# Altium PCB INC-HBAUDIT98.PcbDoc
Units mil, origin at the board's own origin, x right, y up, seen from the top; angles counter-clockwise.
Board outline 10944.88 x 9807.09 mil, 2 copper layers (Top Layer, Bottom Layer); 48 components, 0 nets, 99 pads, 52 vias.
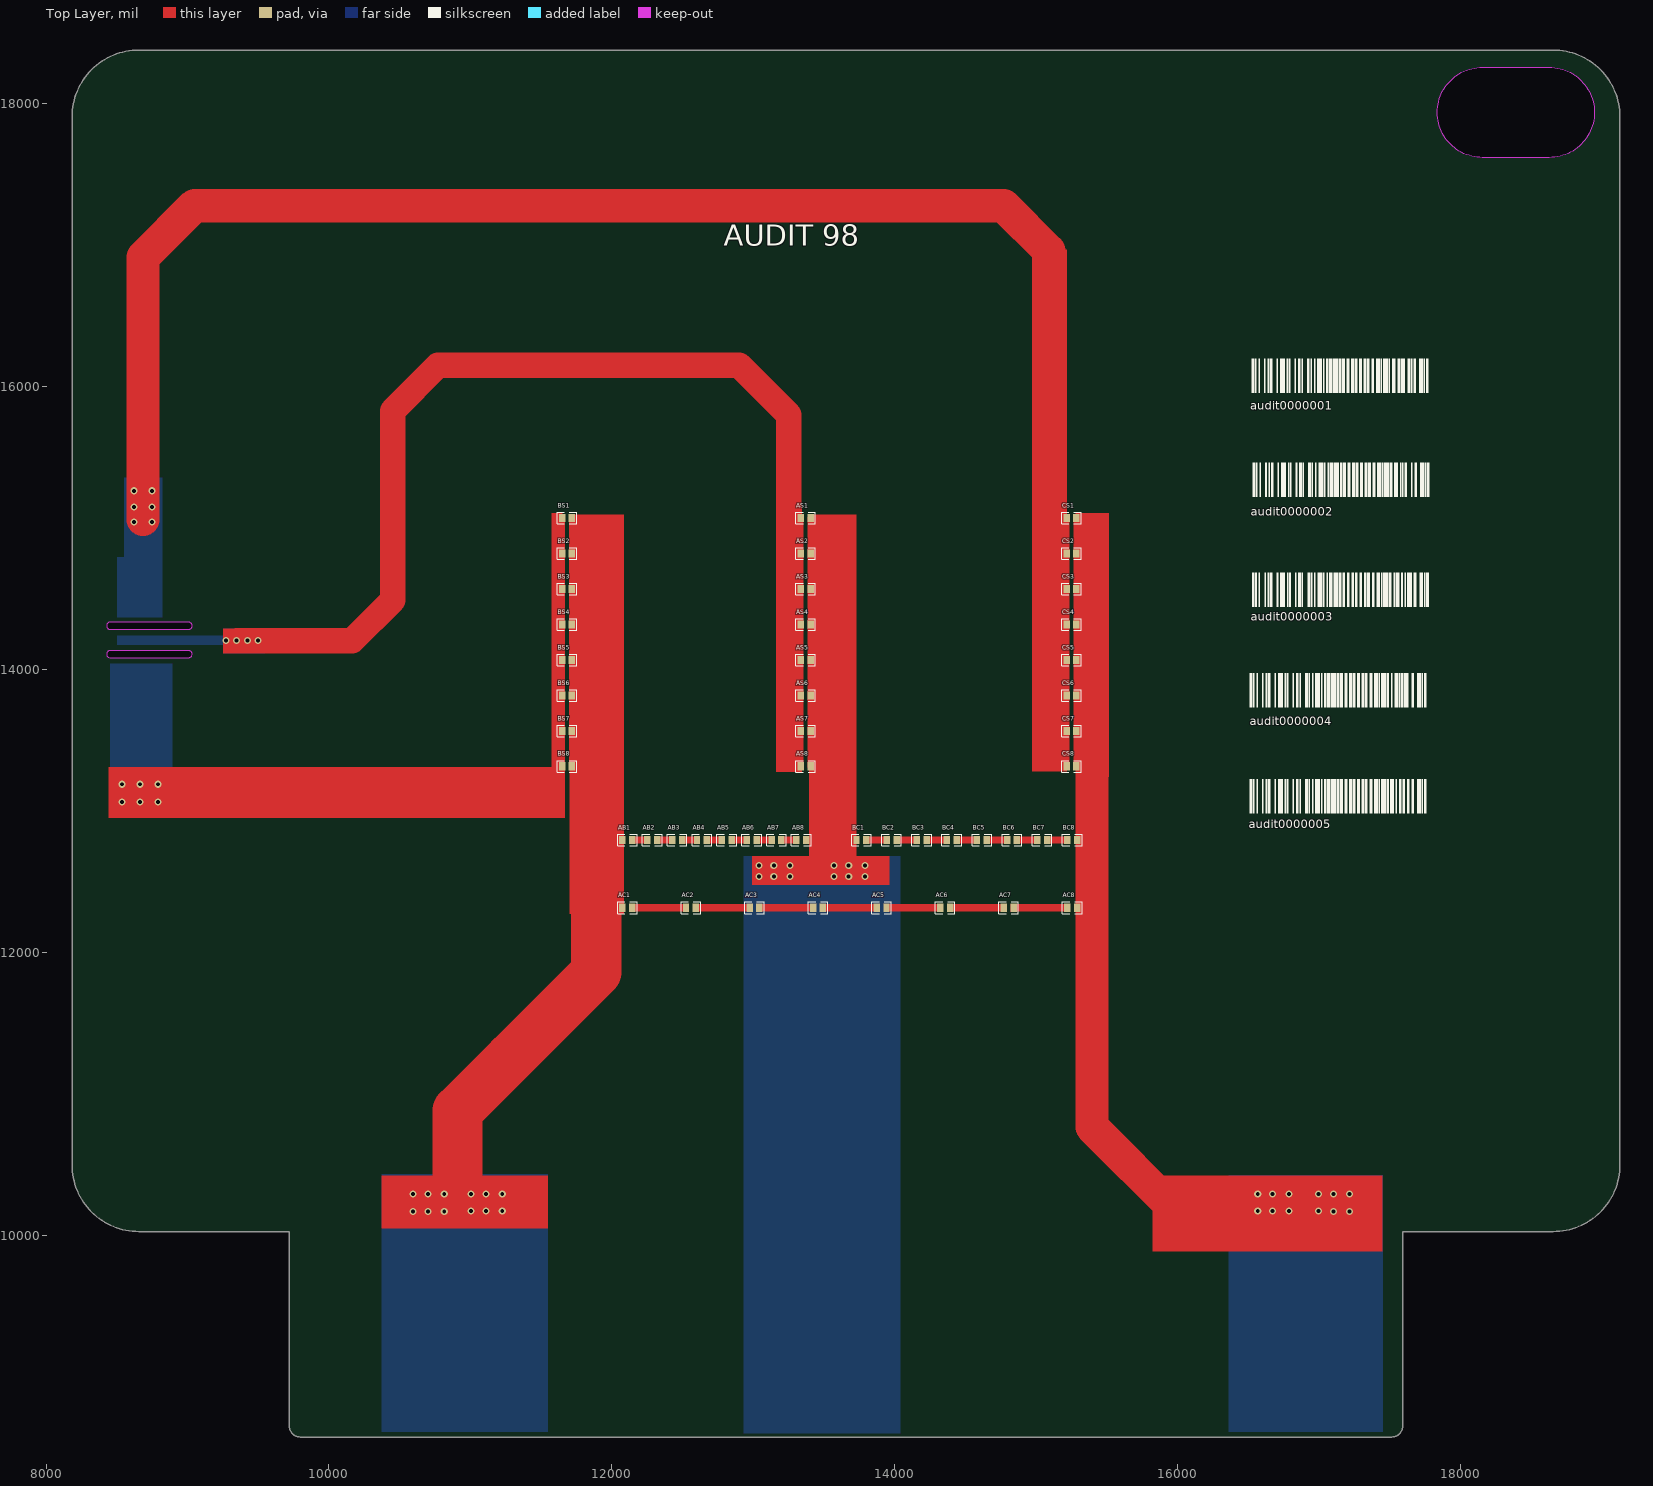
[diagram p0: Top Layer view]
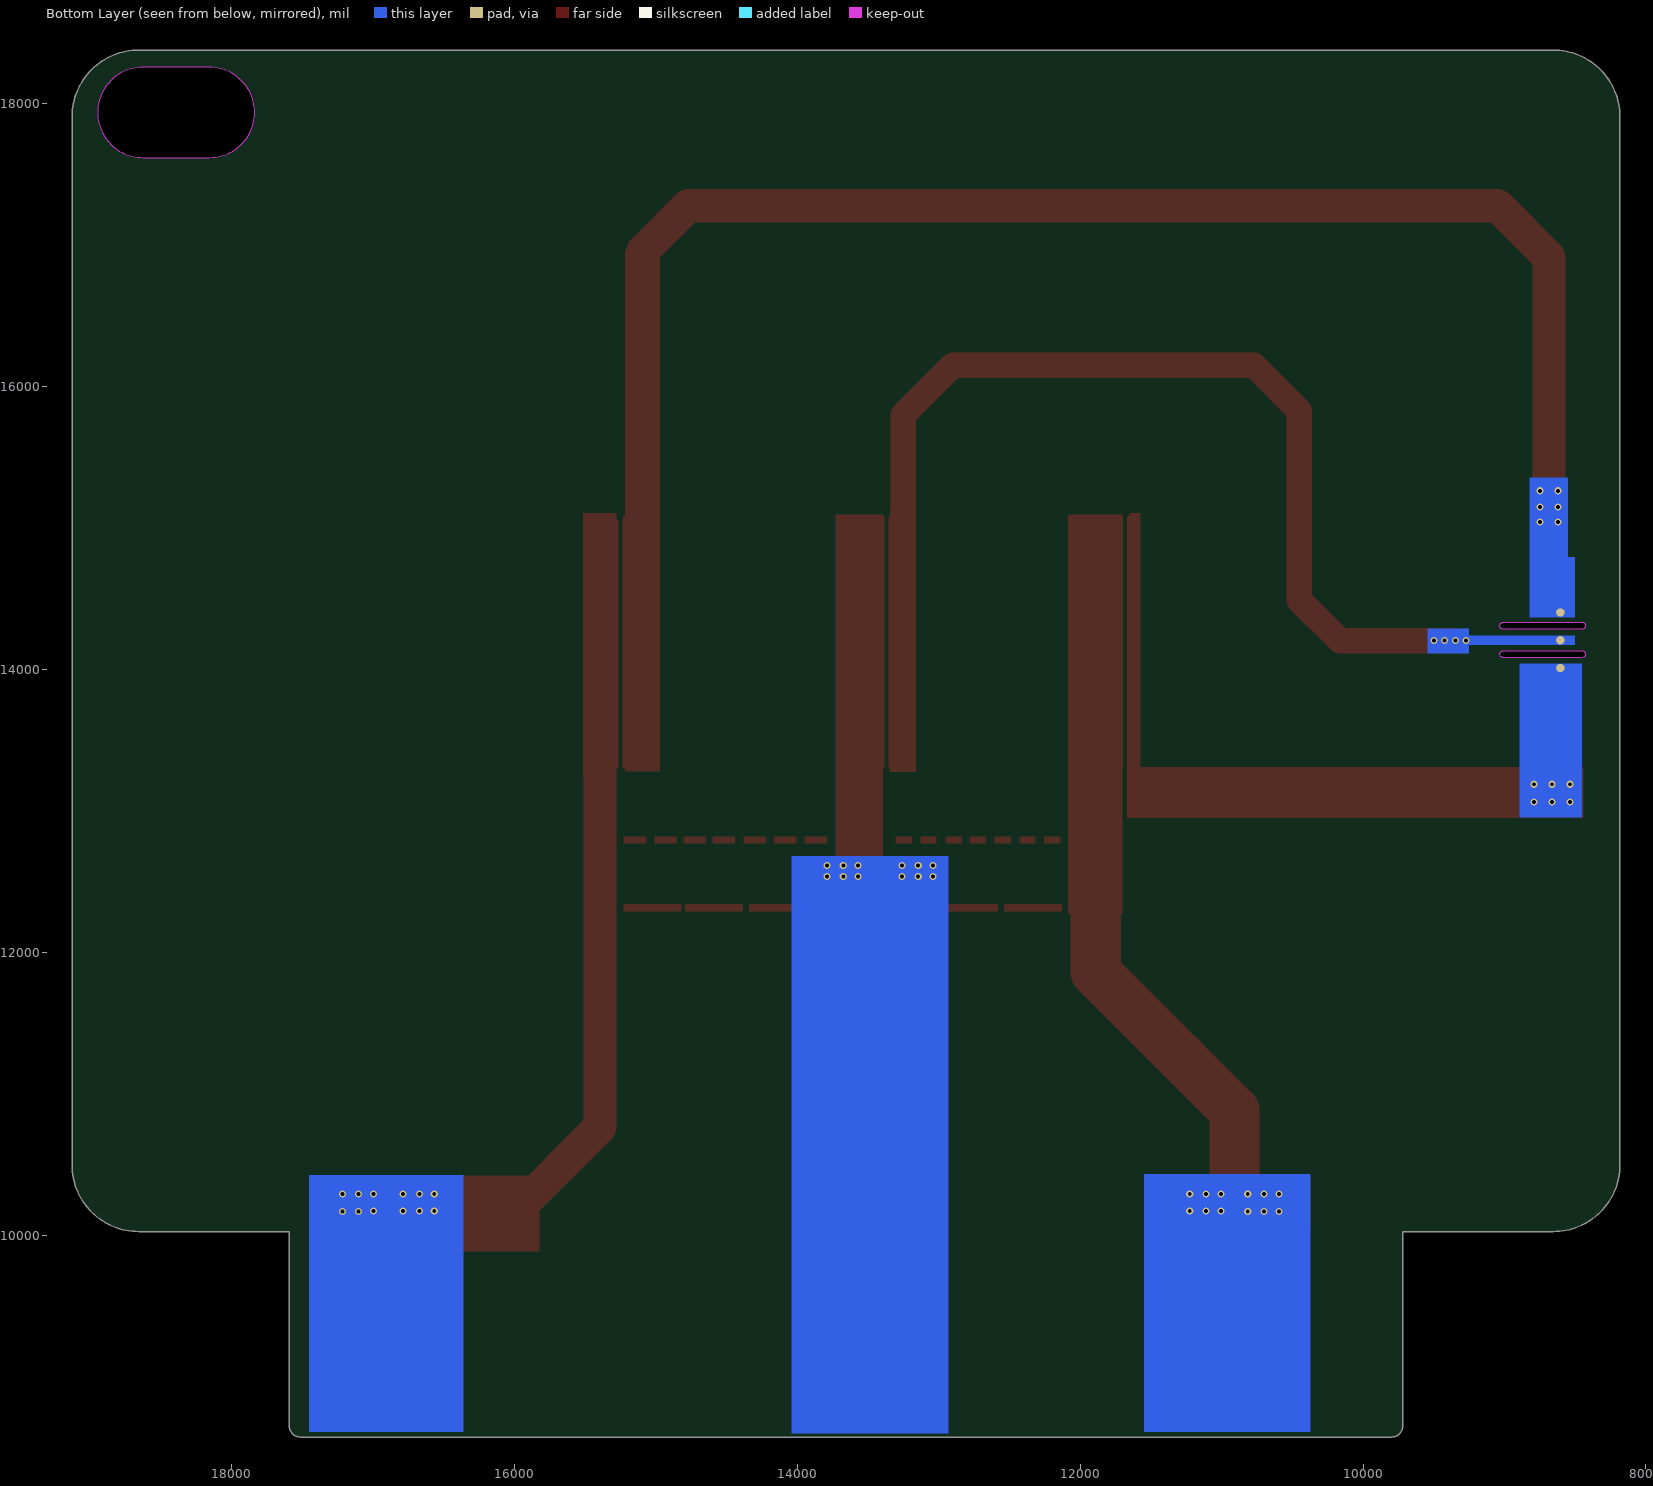
[diagram p1: Bottom Layer view, seen from below]

## Layer stack, top to bottom
Top Solder: solder mask 0.4, Solder Resist, Dk 3.5
Top Layer: signal copper 1.4
Dielectric 1: dielectric 12.6, FR-4, Dk 4.8
Bottom Layer: signal copper 1.4
Bottom Solder: solder mask 0.4, Solder Resist, Dk 3.5

## Board outline
8655.7,10025.29 9718.7,10025.29 9718.7,8651.28 ccw(c9797.44,8651.28) 9797.44,8572.54 17513.97,8572.54 ccw(c17513.97,8651.28) 17592.71,8651.28 17592.71,10025.29 18655.7,10025.29 ccw(c18655.7,10497.73) 19128.14,10497.73 19128.14,17907.18 ccw(c18655.7,17907.18) 18655.7,18379.62 8655.7,18379.62 ccw(c8655.7,17907.18) 8183.26,17907.18 8183.26,10497.73 ccw(c8655.7,10497.73)
cut-out: 8452.36,14283.35 9007.36,14283.35 ccw(c9007.36,14308.35) 9007.36,14333.35 8452.36,14333.35 ccw(c8452.36,14308.35)
cut-out: 8452.36,14083.35 9007.36,14083.35 ccw(c9007.36,14108.35) 9007.36,14133.35 8452.36,14133.35 ccw(c8452.36,14108.35)
cut-out: 18155.7,17619.78 cw(c18155.7,17938.68) 18155.7,18257.58 18628.14,18257.58 cw(c18628.14,17938.68) 18628.14,17619.78

## Design rules (kind name [scope] priority, off if disabled: settings)
Clearance [All] p1 off: gap=10 ignorepadtopadclearanceinfootprint=FALSE except(0: Arc-Hole Track-Hole SMDPad-Hole THPad-Hole Via-Hole Fill-Hole Poly-Hole Region-Hole Text-Hole)
PolygonConnect [All] p1: connectstyle=Relief reliefconductorwidth=10 reliefentries=4 polygonreliefangle="90 Angle" airgapwidth=10
RoutingVias [All] p1: holewidth=28 width=50 viastyle="Through Hole" minholewidth=28 minwidth=50 maxholewidth=28 maxwidth=50
ShortCircuit [All] p1 off: allowed=TRUE
SolderMaskExpansion [All] p1: expansion=4
Width [All] p1: maxlimit=1000 minlimit=10 preferedwidth=10
29 further rules are at their usual default settings.

## Components (designator, comment, footprint, x,y, rotation, side; value= is the part's Value field where it differs from the comment)
AB1 "Comment" 0805_R 12110,12795 r0 top
AB2 "Comment" 0805_R 12285.71,12795 r0 top
AB3 "Comment" 0805_R 12461.42,12795 r0 top
AB4 "Comment" 0805_R 12637.13,12795 r0 top
AB5 "Comment" 0805_R 12812.83,12795 r0 top
AB6 "Comment" 0805_R 12988.54,12795 r0 top
AB7 "Comment" 0805_R 13164.25,12795 r0 top
AB8 "Comment" 0805_R 13339.96,12795 r0 top
AC1 "Comment" 0805_R 12110,12315 r0 top
AC2 "Comment" 0805_R 12559.29,12315 r0 top
AC3 "Comment" 0805_R 13008.57,12315 r0 top
AC4 "Comment" 0805_R 13457.86,12315 r0 top
AC5 "Comment" 0805_R 13907.14,12315 r0 top
AC6 "Comment" 0805_R 14356.43,12315 r0 top
AC7 "Comment" 0805_R 14805.71,12315 r0 top
AC8 "Comment" 0805_R 15255,12315 r0 top
AS1 "Comment" 0805_R 13369.96,15070 r0 top
AS2 "Comment" 0805_R 13369.96,14819.29 r0 top
AS3 "Comment" 0805_R 13369.96,14568.57 r0 top
AS4 "Comment" 0805_R 13369.96,14317.86 r0 top
AS5 "Comment" 0805_R 13369.96,14067.14 r0 top
AS6 "Comment" 0805_R 13369.96,13816.43 r0 top
AS7 "Comment" 0805_R 13369.96,13565.71 r0 top
AS8 "Comment" 0805_R 13369.96,13315 r0 top
BC1 "Comment" 0805_R 13765.04,12795 r0 top
BC2 "Comment" 0805_R 13977.89,12795 r0 top
BC3 "Comment" 0805_R 14190.74,12795 r0 top
BC4 "Comment" 0805_R 14403.59,12795 r0 top
BC5 "Comment" 0805_R 14616.45,12795 r0 top
BC6 "Comment" 0805_R 14829.3,12795 r0 top
BC7 "Comment" 0805_R 15042.15,12795 r0 top
BC8 "Comment" 0805_R 15255,12795 r0 top
BS1 "Comment" 0805_R 11682.86,15070 r0 top
BS2 "Comment" 0805_R 11682.86,14819.29 r0 top
BS3 "Comment" 0805_R 11682.86,14568.57 r0 top
BS4 "Comment" 0805_R 11682.86,14317.86 r0 top
BS5 "Comment" 0805_R 11682.86,14067.14 r0 top
BS6 "Comment" 0805_R 11682.86,13816.43 r0 top
BS7 "Comment" 0805_R 11682.86,13565.71 r0 top
BS8 "Comment" 0805_R 11682.86,13315 r0 top
CS1 "Comment" 0805_R 15250.04,15070 r0 top
CS2 "Comment" 0805_R 15250.04,14819.29 r0 top
CS3 "Comment" 0805_R 15250.04,14568.57 r0 top
CS4 "Comment" 0805_R 15250.04,14317.86 r0 top
CS5 "Comment" 0805_R 15250.04,14067.14 r0 top
CS6 "Comment" 0805_R 15250.04,13816.43 r0 top
CS7 "Comment" 0805_R 15250.04,13565.71 r0 top
CS8 "Comment" 0805_R 15250.04,13315 r0 top

## Footprints (in the part's own frame and the unit in brackets; to place one, negate y for a bottom-side part, rotate by r counter-clockwise, add the part's x,y. Pads: shape width x height; smd on the part's side, far side on the other; paste and mask are expansions set on the pad)
0805_R [mm]
  rect 1.16x1.47 smd: 1(-0.89,0) 2(0.89,0)
  silkscreen extent -1.77,-1.04 1.77,1.03, body extent -1,-0.62 1,0.63, height 0.49

## Free pads (board coordinates)
  round 59.06 smd far side: 1(8604.52,14009.54) 2(8604.52,14206.4) 3(8604.52,14403.25)

## Via types
v1: diameter 50, hole 28, Top Layer to Bottom Layer, tented both sides, 52 vias

## Nets (pads, with @x,y where several pads share a name; then routed paths per layer and width w, separated by ;. In a path a pad name is that pad's centre, name@x,y a point inside that pad or via, vN(x,y) a via of type N, cw(c..) or ccw(c..) an arc to the next point about the centre after c; other vN are vias at no path point)
pads on no net: AB1.1 AB1.2 AB2.1 AB2.2 AB3.1 AB3.2 AB4.1 AB4.2 AB5.1 AB5.2 AB6.1 AB6.2 AB7.1 AB7.2 AB8.1 AB8.2 AC1.1 AC1.2 AC2.1 AC2.2 AC3.1 AC3.2 AC4.1 AC4.2 AC5.1 AC5.2 AC6.1 AC6.2 AC7.1 AC7.2 AC8.1 AC8.2 AS1.1 AS1.2 AS2.1 AS2.2 AS3.1 AS3.2 AS4.1 AS4.2 AS5.1 AS5.2 AS6.1 AS6.2 AS7.1 AS7.2 AS8.1 AS8.2 BC1.1 BC1.2 BC2.1 BC2.2 BC3.1 BC3.2 BC4.1 BC4.2 BC5.1 BC5.2 BC6.1 BC6.2 BC7.1 BC7.2 BC8.1 BC8.2 BS1.1 BS1.2 BS2.1 BS2.2 BS3.1 BS3.2 BS4.1 BS4.2 BS5.1 BS5.2 BS6.1 BS6.2 BS7.1 BS7.2 BS8.1 BS8.2 CS1.1 CS1.2 CS2.1 CS2.2 CS3.1 CS3.2 CS4.1 CS4.2 CS5.1 CS5.2 CS6.1 CS6.2 CS7.1 CS7.2 CS8.1 CS8.2
copper on no net: | length 34090.1
  Top Layer w40: 11647.82,13315 11647.82,13565.71 11647.82,13816.43 11647.82,14067.14 11647.82,14317.86 11647.82,14568.57 11647.82,14819.29 11647.82,15070 ; 11717.9,13315 11717.9,13565.71 11717.9,13816.43 11717.9,14067.14 11717.9,14317.86 11717.9,14568.57 11717.9,14819.29 11717.9,15070 ; 13334.92,13315 13334.92,13565.71 13334.92,13816.43 13334.92,14067.14 13334.92,14317.86 13334.92,14568.57 13334.92,14819.29 13334.92,15070 ; 13405,13315 13405,13565.71 13405,13816.43 13405,14067.14 13405,14317.86 13405,14568.57 13405,14819.29 13405,15070 ; 15215,13315 15215,13565.71 15215,13816.43 15215,14067.14 15215,14317.86 15215,14568.57 15215,14819.29 15215,15070 ; 15285.08,13315 15285.08,13565.71 15285.08,13816.43 15285.08,14067.14 15285.08,14317.86 15285.08,14568.57 15285.08,14819.29 15285.08,15045
  Top Layer w181.1: v1(9347.36,14203.35) 10163.35,14203.35 10450,14490 10450,15480 10450,15830 10770,16150 12900,16150 13250,15800 13250,15740 13250,14935
  Top Layer w236.22: 8685,15060 8685,16670 ; 8685,16630 8685,16915 9050,17280 14770,17280 15090,16960 15090,16405 ; 15395,11490 15395,13425 ; 15395,11960 15395,10765 15980,10180 16090,10180 16100,10190 ; 16012,10197 16022,10187 ; 16582,10197 17012,10197 17092,10197
  Top Layer w314.96: 11890,12360 11905,12580 11915,12590
  Top Layer w354.33: 10910,10240 10910,10880 11655,11625 ; 11285,11255 11890,11860 11890,12360
  Bottom Layer w300: 13330,9061.07 13367.51,9023.55
  other v1: 10595,10167 10700,10167 10815,10167 17102,10167 17217,10167 11005,10172 11110,10172 11225,10172 16567,10172 16672,10172 16787,10172 16997,10172 10595,10292 10700,10292 10815,10292 11005,10292 11110,10292 11225,10292 16567,10292 16672,10292 16787,10292 16997,10292 17102,10292 17217,10292 13040,12535 13145,12535 13260,12535 13570,12535 13675,12535 13790,12535 13040,12615 13145,12615 13260,12615 13570,12615 13675,12615 13790,12615 8537.36,13063.35 8664.86,13063.35 8792.36,13063.35 8537.36,13188.35 8664.86,13188.35 8792.36,13188.35 9272.36,14203.35 9424.86,14203.35 9497.36,14203.35 8622.36,15043.35 8747.36,15043.35 8622.36,15148.35 8747.36,15148.35 8622.36,15263.35 8747.36,15263.35

## Other copper
Top Layer:
  rectangle: 10373,10048 11548,10423
  rectangle: 12990,12475 13965,12680
  rectangle: 11575,13200 11650,15105
  rectangle: 13395,12475 13730,15095
  rectangle: 13160,13275 13345,15140
  rectangle: 9252.36,14113.35 9542.36,14288.35
  rectangle: 14970,13280 15220,16970
  rectangle: 15280,13240 15515,15105
  rectangle: 11700,12270 12085,15095
  rectangle: 8440,12950 11670,13310
  rectangle: 15823,9886 17448,10421
  rectangle: 12130,12290 12540,12340
  rectangle: 12580,12290 12990,12340
  rectangle: 13030,12290 13440,12340
  rectangle: 13480,12290 13890,12340
  rectangle: 13930,12290 14340,12340
  rectangle: 14385,12290 14795,12340
  rectangle: 14820,12290 15230,12340
  rectangle: 12140,12770 12255,12820
  rectangle: 12315,12770 12430,12820
  rectangle: 12490,12770 12605,12820
  rectangle: 12665,12770 12780,12820
  rectangle: 12835,12770 12950,12820
  rectangle: 13015,12770 13130,12820
  rectangle: 13190,12770 13305,12820
  rectangle: 13790,12770 13950,12820
  rectangle: 14005,12770 14165,12820
  rectangle: 14220,12770 14380,12820
  rectangle: 14440,12770 14600,12820
  rectangle: 14645,12770 14805,12820
  rectangle: 14850,12770 15010,12820
  rectangle: 15070,12770 15230,12820
Bottom Layer:
  rectangle: 8502.36,14173.35 9322.36,14238.35
  rectangle: 16362,8607 17452,10427
  rectangle: 10370,8607 11550,10432
  rectangle: 9252.36,14113.35 9542.36,14288.35
  rectangle: 9102.36,14173.35 9542.36,14238.35
  rectangle: 8502.36,14368.35 8822.36,14793.35
  rectangle: 8552.36,14373.35 8822.36,15358.35
  rectangle: 8452.36,12953.35 8892.36,14043.35
  rectangle: 12930,8597 14040,12680

## Silkscreen, mask and mechanical layers (free items; w line width, h text height)
Top Overlay:
  drawing of 215 lines, arcs and shapes, not listed
  text "AUDIT 98" at 12790,16995 h150
  text "audit0000001" at 16513,15837 h60
  text "audit0000002" at 16519,15085 h60
  text "audit0000003" at 16518,14343 h60
  text "audit0000004" at 16510,13605 h60
  text "audit0000005" at 16504,12877 h60
Bottom Solder:
  rectangle: 8502.36,14173.35 8717.36,14238.35
  rectangle: 10473,8602 11478,9737
  rectangle: 8502.36,13918.35 8717.36,14043.35
  rectangle: 8502.36,14368.35 8717.36,14493.35
  rectangle: 16408,8609 17413,9744
  rectangle: 12979,8598 13984,9733
  lines w300: 16782,9162 16807,9162
Mechanical 1:
  lines w0.5: 8183.26,10497.73 ccw(c8655.7,10497.73) 8655.7,10025.29 9718.7,10025.29 9718.7,8651.28 ccw(c9797.44,8651.28) 9797.44,8572.54 13592.77,8572.54 17077.02,8572.54 17513.97,8572.54 ccw(c17513.97,8651.28) 17592.71,8651.28 17592.71,10025.29 18655.7,10025.29 ccw(c18655.7,10497.73) 19128.14,10497.73 19128.14,17907.18 ccw(c18655.7,17907.18) 18655.7,18379.62 8655.7,18379.62 ccw(c8655.7,17907.18) 8183.26,17907.18 8183.26,10497.73 ; 18155.7,17619.78 cw(c18155.7,17938.68) 18155.7,18257.58 18628.14,18257.58 cw(c18628.14,17938.68) 18628.14,17619.78 18155.7,17619.78
  lines w8: 8452.36,14083.35 cw(c8452.36,14108.35) 8452.36,14133.35 9007.36,14133.35 cw(c9007.36,14108.35) 9007.36,14083.35 8452.36,14083.35 ; 8452.36,14283.35 cw(c8452.36,14308.35) 8452.36,14333.35 9007.36,14333.35 cw(c9007.36,14308.35) 9007.36,14283.35 8452.36,14283.35